# Altium PCB dc_p3_t11_PCB.PcbDoc (part 2 of 2)
Units mm, origin at the board's own origin, x right, y up, seen from the top; angles counter-clockwise.
Board outline 99.95 x 100 mm, 2 copper layers (Top Layer, Bottom Layer), stack 1.56 mm thick; 142 components, 91 nets, 397 pads, 74 vias.
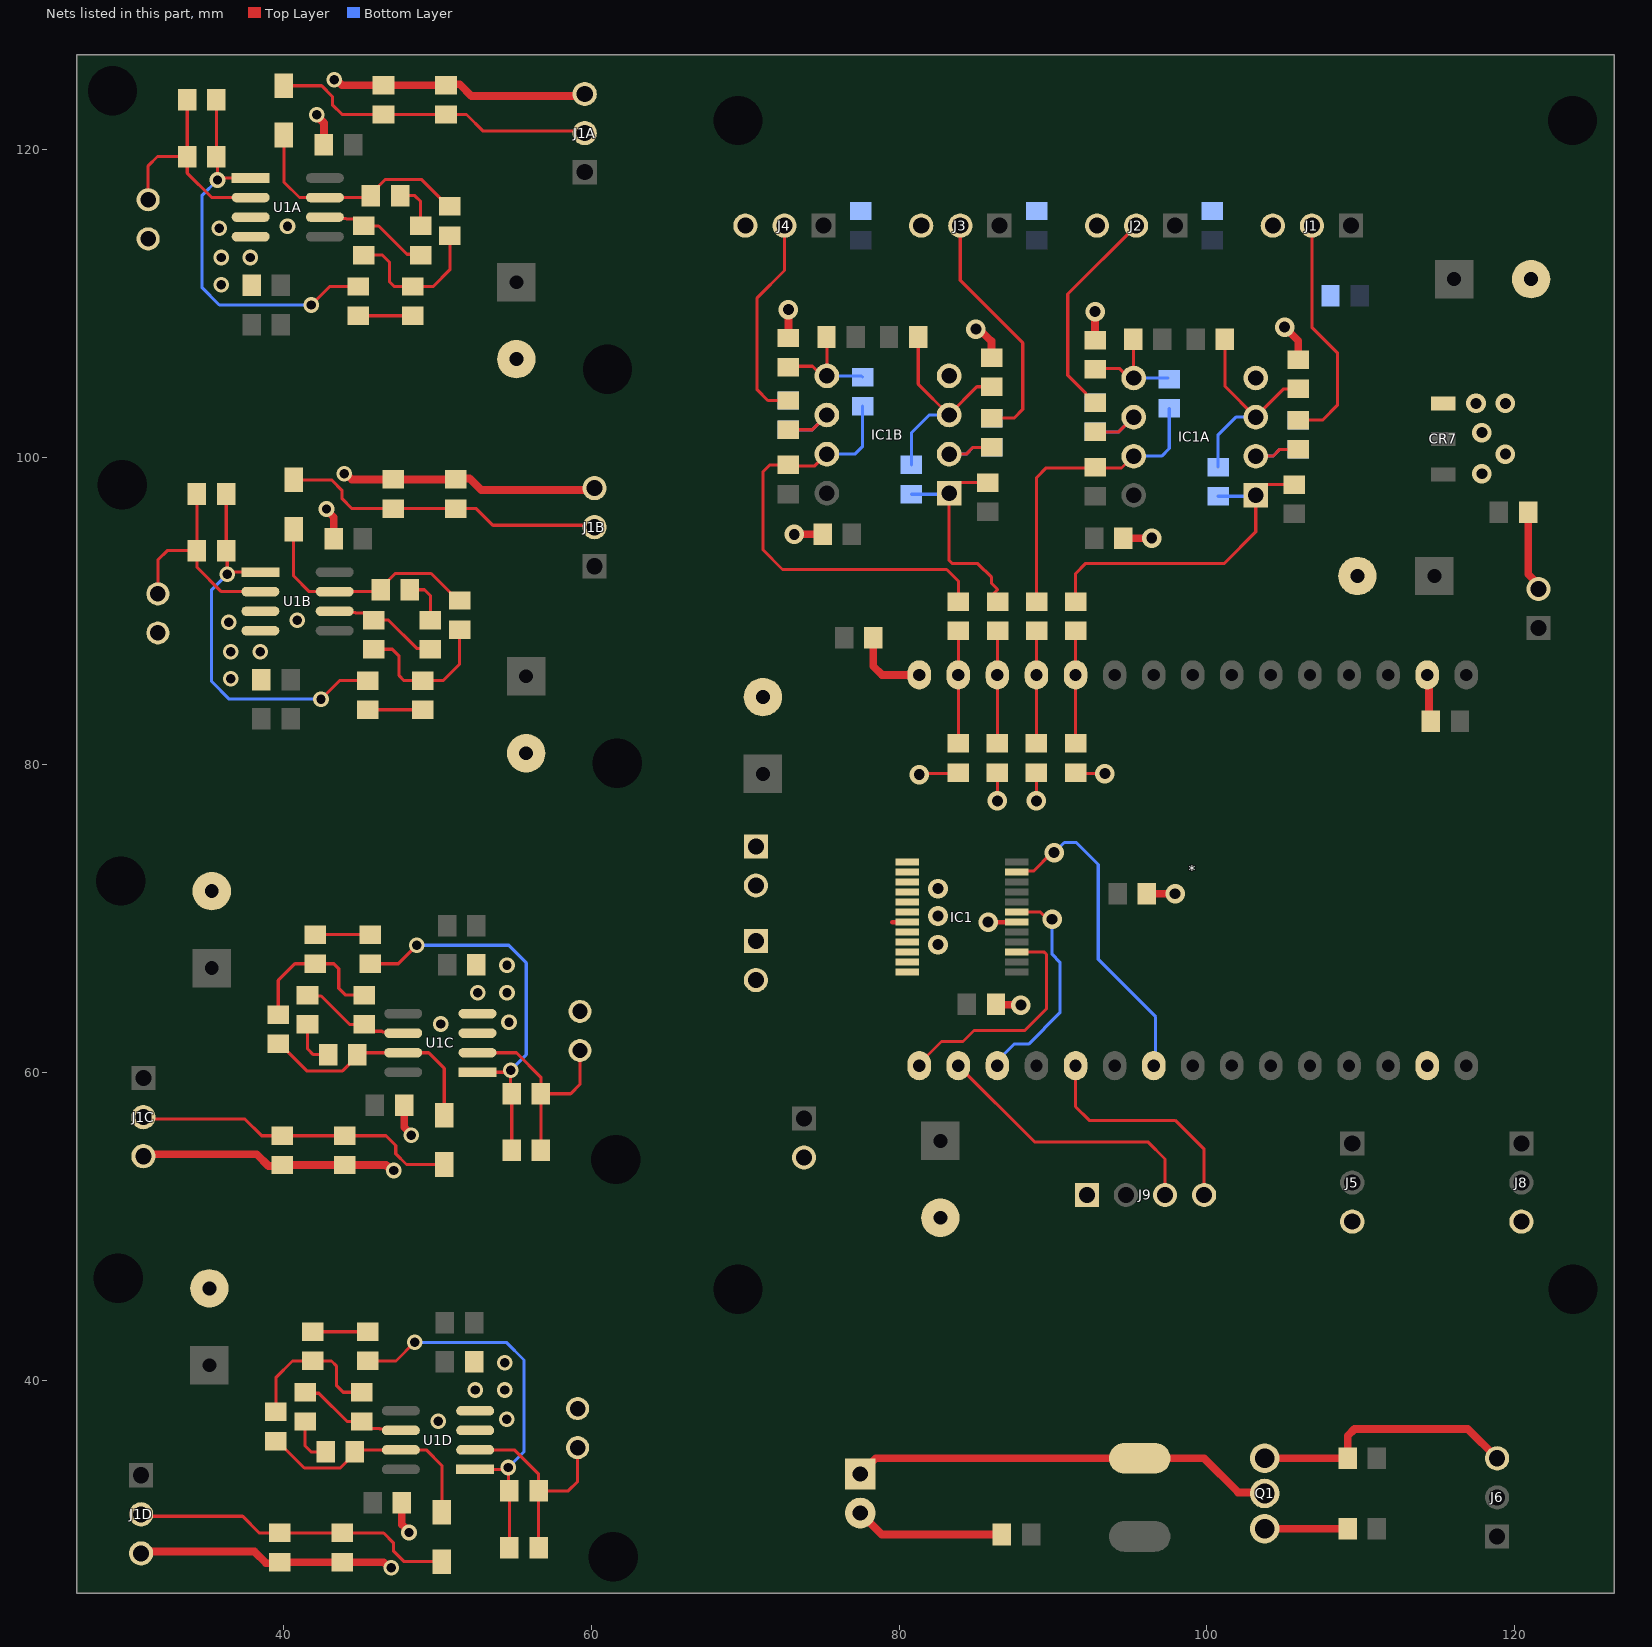
[diagram p2: the nets of this part, all layers, seen from the top]

## Via types
v1: diameter 1.27, hole 0.711, Top Layer to Bottom Layer, 38 vias
v2: diameter 1.016, hole 0.61, Top Layer to Bottom Layer, 36 vias

## Nets (pads, with @x,y where several pads share a name; then routed paths per layer and width w, separated by ;. In a path a pad name is that pad's centre, name@x,y a point inside that pad or via, vN(x,y) a via of type N, cw(c..) or ccw(c..) an arc to the next point about the centre after c; other vN are vias at no path point) (continued)
GND: *.2 *.17 C1.2 C1A.1@91.465,79.507 C1B.1@86.385,79.507 C2.2 C2A.1@88.925,79.507 C2B.1@83.845,79.507 C3.2 C3A.1@105.943,102.415 C3B.1@86.004,102.55 C4.2 C4A.1@92.735,103.558 C4B.1@72.796,103.693 C5A.1@94.574,94.742 C5B.1@75.021,94.996 CM1.2 CM2.2 CM3.2 CM4.1 CR7.1 Cs1.2 Cs2.2 Cs3.2 Cs4.2 IC1.3 IC1.4 IC1.9 IC1.10 IC1.18 IC1A.4 IC1B.4 J1.3 J2.3 J3.3 J4.3 J5.3 J8.3 J9.1 J_5V.2 J_6V.2 R2A.1@105.943,106.352 R2B.1@86.004,106.487 R5A.1@92.735,107.622 R5B.1@72.796,107.757 | length 34
  Top Layer w0.2: v1@85.901,77.494 v1@86.004,77.597
  Top Layer w0.203: v1@81.686,79.441 C2B.1@83.779,79.441 ; C2B.1@83.398,79.375 C2B.1@83.464,79.441 ; v1(86.385,77.663) C1B.1@86.385,79.507 ; v1(88.925,77.663) C2A.1@88.925,79.507 ; C1A.1@91.084,79.441 C1A.1@91.15,79.375 ; C1A.1@91.531,79.441 v1(93.37,79.441)
  Top Layer w0.3: v1(85.781,69.779) IC1.18@87.636,69.779
  Top Layer w0.5: CR7.1@115.367,103.494 CR7.1@115.372,103.499 ; v1@117.495,103.499 v1(117.5,103.505) ; C1.2@120.889,96.418 120.889,92.406 121.564,91.731 J_5V.2@121.564,91.44
  Top Layer w0.508: R5B.1@72.796,107.757 v1(72.796,109.601) ; v1(73.177,94.996) C5B.1@75.021,94.996 ; IC1B.4@83.243,105.291 IC1B.4@83.27,105.318 ; v1(84.988,108.331) 85.195,108.331 85.957,107.569 86.004,107.569 R2B.1@86.004,106.487 ; CM2.2@86.294,64.44 86.319,64.414 87.884,64.414 v1(87.909,64.389) ; R5A.1@92.735,107.622 v1(92.735,109.474) ; C5A.1@94.574,94.742 v1(96.418,94.742) ; CM4.1@96.098,71.628 v1(97.942,71.628) ; v1(105.054,108.458) 105.943,107.569 R2A.1@105.943,106.352 ; *.2@114.325,85.852 114.442,85.736 114.442,82.971 C3.2@114.558,82.854
  other v1: 82.525,68.326 82.525,70.18 82.525,71.958 81.305,79.375 117.881,98.933 119.405,100.203 117.881,101.6 119.405,103.505
GND_e: J6.3 Q1.3 Re1.1 | length 17.5
  Top Layer w0.508: Q1.3@103.759,34.929 103.761,34.927 109.157,34.927 Re1.1@109.159,34.925 109.159,36.388 109.601,36.83 116.967,36.83 J6.3@118.872,34.925
GNDA: C4A.2@50.539,124.187 C5A.1@42.604,120.316 C6A.2 D1A.2 J1A.3 R6A.1@46.475,124.187 R8A.1@37.905,111.172 U1A.3 U1A.4 | length 18.7
  Top Layer w0.508: v2(42.139,122.262) 42.139,122.195 42.604,121.73 C5A.1@42.604,120.316 ; v2(43.282,124.548) 43.419,124.548 43.781,124.187 R6A.1@46.475,124.187 C4A.2@50.539,124.187 ; C4A.2@50.605,124.253 51.428,124.253 52.19,123.491 J1A.3@59.429,123.491
  other v2: 35.916,111.213 35.916,112.991 37.821,112.991 35.789,114.896 40.234,115.023
GNDB: C4B.2@51.174,98.566 C5B.1@43.239,94.695 C6B.2 D1B.2 J1B.3 R6B.1@47.11,98.566 R8B.1@38.54,85.551 U1B.3 U1B.4 | length 18.7
  Top Layer w0.508: v2(42.774,96.642) 42.774,96.575 43.239,96.11 C5B.1@43.239,94.695 ; v2(43.917,98.928) 44.054,98.928 44.416,98.566 R6B.1@47.11,98.566 C4B.2@51.174,98.566 ; C4B.2@51.24,98.632 52.063,98.632 52.825,97.87 J1B.3@60.064,97.87
  other v2: 36.551,85.593 36.551,87.371 38.456,87.371 36.424,89.276 40.869,89.403
GNDC: C4C.2 C5C.1 C6C.2 D1C.2 J1C.3 R6C.1 R8C.1 U1C.3 U1C.4 | length 18.7
  Top Layer w0.508: J1C.3@30.995,54.69 38.234,54.69 38.996,53.928 C4C.2@39.819,53.928 ; C4C.2@39.885,53.994 R6C.1@43.949,53.994 46.643,53.994 47.005,53.633 v2(47.142,53.633) ; C5C.1@47.82,57.865 47.82,56.451 48.285,55.986 v2(48.285,55.919)
  other v2: 50.19,63.158 54.635,63.285 52.603,65.19 54.508,65.19 54.508,66.968
GNDD: C4D.2 C5D.1 C6D.2 D1D.2 J1D.3 R6D.1 R8D.1 U1D.3 U1D.4 | length 18.7
  Top Layer w0.508: J1D.3@30.842,28.87 38.081,28.87 38.843,28.108 C4D.2@39.666,28.108 ; C4D.2@39.732,28.174 R6D.1@43.796,28.174 46.491,28.174 46.853,27.813 v2(46.99,27.813) ; C5D.1@47.667,32.045 47.667,30.631 48.133,30.166 v2(48.133,30.099)
  other v2: 50.038,37.338 54.483,37.465 52.451,39.37 54.356,39.37 54.356,41.148
MA+: IC1.1 IC1.2 J12.1
MA-: IC1.5 IC1.6 J12.2
MB+: IC1.11 IC1.12 J13.2
MB-: IC1.7 IC1.8 J13.1 | length 1
  Top Layer w0.3: 79.561,69.779 IC1.7@80.512,69.779
Net*_15: *.15 R1.2 | length 5.1
  Top Layer w0.508: R1.2@78.318,88.265 78.318,86.426 78.892,85.852 *.15@81.305,85.852
NetC1A_2: C1A.2@33.714,123.237 D1A.1 R1A.1@33.714,119.554 U1A.2 | length 14.4
  Top Layer w0.203: D1A.1@31.176,116.743 31.176,118.945 31.785,119.554 R1A.1@33.714,119.554 C1A.2@33.714,123.237 ; R1A.1@33.714,119.454 33.714,118.472 35.299,116.887 U1A.2@37.839,116.887
NetC1B_2: C1B.2@34.349,97.616 D1B.1 R1B.1@34.349,93.933 U1B.2 | length 14.4
  Top Layer w0.203: D1B.1@31.811,91.123 31.811,93.324 32.42,93.933 R1B.1@34.349,93.933 C1B.2@34.349,97.616 ; R1B.1@34.349,93.833 34.349,92.851 35.934,91.266 U1B.2@38.474,91.266
NetC1C_2: C1C.2 D1C.1 R1C.1 U1C.2 | length 14.4
  Top Layer w0.203: U1C.2@52.585,61.294 55.125,61.294 56.71,59.709 R1C.1@56.71,58.727 ; C1C.2@56.71,54.944 R1C.1@56.71,58.627 58.639,58.627 59.248,59.236 D1C.1@59.248,61.438
NetC1D_2: C1D.2 D1D.1 R1D.1 U1D.2 | length 14.4
  Top Layer w0.203: U1D.2@52.433,35.474 54.972,35.474 56.557,33.889 R1D.1@56.557,32.907 ; C1D.2@56.557,29.124 R1D.1@56.557,32.807 58.487,32.807 59.096,33.416 D1D.1@59.096,35.618
NetC2A_1: C2A.1@45.205,115.043 R4A.1@48.888,113.143 U1A.6 | length 6.4
  Top Layer w0.203: U1A.6@42.746,115.536 44.016,115.536 44.062,115.49 C2A.1@44.758,115.49 ; C2A.1@45.205,115.043 46.16,115.043 47.999,113.204 R4A.1@48.827,113.204
NetC2A_2: C2A.2@45.205,113.143 C3A.2@50.793,114.413 R3A.2@48.38,111.106 | length 9.8
  Top Layer w0.203: C2A.2@45.205,113.143 46.409,113.143 46.856,112.696 46.856,111.426 47.176,111.106 R3A.2@48.38,111.106 49.711,111.106 50.793,112.188 C3A.2@50.793,114.413
NetC2B_1: C2B.1@45.84,89.422 R4B.1@49.523,87.522 U1B.6 | length 6.4
  Top Layer w0.203: U1B.6@43.381,89.916 44.651,89.916 44.697,89.869 C2B.1@45.393,89.869 ; C2B.1@45.84,89.422 46.795,89.422 48.634,87.583 R4B.1@49.462,87.583
NetC2B_2: C2B.2@45.84,87.522 C3B.2@51.428,88.792 R3B.2@49.015,85.485 | length 9.8
  Top Layer w0.203: C2B.2@45.84,87.522 47.044,87.522 47.491,87.075 47.491,85.805 47.811,85.485 R3B.2@49.015,85.485 50.346,85.485 51.428,86.567 C3B.2@51.428,88.792
NetC2C_1: C2C.1 R4C.1 U1C.6 | length 6.4
  Top Layer w0.203: R4C.1@41.597,64.977 42.425,64.977 44.264,63.138 C2C.1@45.219,63.138 ; C2C.1@45.666,62.691 46.362,62.691 46.408,62.645 U1C.6@47.678,62.645
NetC2C_2: C2C.2 C3C.2 R3C.2 | length 9.8
  Top Layer w0.203: C3C.2@39.631,63.768 39.631,65.993 40.713,67.075 R3C.2@42.044,67.075 43.248,67.075 43.568,66.755 43.568,65.485 44.015,65.038 C2C.2@45.219,65.038
NetC2D_1: C2D.1 R4D.1 U1D.6 | length 6.4
  Top Layer w0.203: R4D.1@41.444,39.157 42.272,39.157 44.111,37.318 C2D.1@45.066,37.318 ; C2D.1@45.513,36.871 46.209,36.871 46.256,36.825 U1D.6@47.526,36.825
NetC2D_2: C2D.2 C3D.2 R3D.2 | length 9.8
  Top Layer w0.203: C3D.2@39.478,37.948 39.478,40.173 40.56,41.255 R3D.2@41.891,41.255 43.095,41.255 43.415,40.935 43.415,39.665 43.862,39.218 C2D.2@45.066,39.218
NetJ7_2: J7.2 LED1.1 Q1.2 | length 27.7
  Top Layer w0.508: LED1.1@77.47,33.909 78.486,34.925 J7.2@95.631,34.925 99.822,34.925 102.037,32.71 103.688,32.71 Q1.2@103.759,32.639
NetLED1_2: LED1.2 Re3.1 | length 9.8
  Top Layer w0.508: LED1.2@77.47,31.369 78.867,29.972 Re3.1@86.68,29.972
NetQ1_1: Q1.1 Re2.2 | length 5.4
  Top Layer w0.508: Q1.1@103.759,30.349 103.761,30.351 109.157,30.351 Re2.2@109.159,30.353
NetR2A_2: R2A.2@44.824,109.206 R3A.1@48.38,109.206 | length 3.6
  Top Layer w0.203: R2A.2@44.824,109.206 R3A.1@48.38,109.206
NetR2B_2: R2B.2@45.459,83.585 R3B.1@49.015,83.585 | length 3.6
  Top Layer w0.203: R2B.2@45.459,83.585 R3B.1@49.015,83.585
NetR2C_2: R2C.2 R3C.1 | length 3.6
  Top Layer w0.203: R3C.1@42.044,68.975 R2C.2@45.6,68.975
NetR2D_2: R2D.2 R3D.1 | length 3.6
  Top Layer w0.203: R3D.1@41.891,43.155 R2D.2@45.447,43.155
NetR4A_2: R4A.2@48.888,115.043 R5A.1@47.552,117.014 | length 3.1
  Top Layer w0.203: R5A.1@47.552,117.014 48.507,117.014 48.888,116.633 R4A.2@48.888,115.043
NetR4B_2: R4B.2@49.523,89.422 R5B.1@48.187,91.393 | length 3.1
  Top Layer w0.203: R5B.1@48.187,91.393 49.142,91.393 49.523,91.012 R4B.2@49.523,89.422
NetR4C_2: R4C.2 R5C.1 | length 3.1
  Top Layer w0.203: R4C.2@41.536,63.138 41.536,61.548 41.917,61.167 R5C.1@42.872,61.167
NetR4D_2: R4D.2 R5D.1 | length 3.1
  Top Layer w0.203: R4D.2@41.383,37.318 41.383,35.728 41.764,35.347 R5D.1@42.719,35.347
PWMA: *.24 IC1.23 | length 21.3
  Top Layer w0.203: IC1.23@87.636,73.029 87.705,73.098 88.733,73.098 89.93,74.295 v1(90.068,74.295)
  Bottom Layer w0.203: v1(90.068,74.295) 90.077,74.295 90.737,74.955 91.516,74.955 92.939,73.533 92.939,67.361 96.672,63.627 *.24@96.672,60.452
PWMB: *.30 IC1.15 | length 15.8
  Top Layer w0.203: *.30@80.924,60.198 82.753,62.027 84.15,62.027 84.861,62.738 88.163,62.738 89.58,64.155 89.58,67.69 89.441,67.829 IC1.15@87.636,67.829
SCL: *.29 J9.3 | length 18.3
  Top Layer w0.203: *.29@83.845,60.452 88.798,55.499 96.164,55.499 97.282,54.381 J9.3@97.282,52.045
SDA: *.26 J9.4 | length 15.1
  Top Layer w0.203: *.26@91.465,60.452 91.465,57.785 92.354,56.896 97.942,56.896 99.822,55.016 J9.4@99.822,52.045
STBY: *.28 IC1.19 | length 14.9
  Top Layer w0.2: IC1.19@87.636,70.429 89.193,70.429 89.653,69.968 v1(89.943,69.968)
  Bottom Layer w0.203: *.28@86.004,60.198 86.004,60.386 87.467,61.849 88.417,61.849 90.449,63.881 90.449,67.183 89.943,67.69 v1(89.943,69.968)
V1+A: IC1A.3 R1A.1@101.178,107.688 R2A.2@105.943,104.452 R3A.1@100.736,99.367 | length 14.4
  Top Layer w0.203: R1A.1@101.178,107.688 101.178,104.62 IC1A.3@103.182,102.616 ; IC1A.3@103.182,102.641 104.993,104.452 R2A.2@105.943,104.452
  Bottom Layer w0.203: R3A.1@100.736,99.367 100.736,101.465 101.887,102.616 IC1A.3@103.182,102.616
V1+B: IC1B.3 R1B.1@81.239,107.823 R2B.2@86.004,104.587 R3B.1@80.797,99.502 | length 14.5
  Top Layer w0.203: R1B.1@81.239,107.823 81.239,104.755 IC1B.3@83.243,102.751 83.243,102.776 85.054,104.587 R2B.2@86.004,104.587
  Bottom Layer w0.203: R3B.1@80.797,99.502 80.797,101.6 81.948,102.751 IC1B.3@83.243,102.751
V1-A: C3A.2@105.943,100.515 IC1A.2 R11A.2 | length 5.9
  Top Layer w0.203: IC1A.2@103.182,100.076 104.3,100.076 104.739,100.515 R11A.2@105.943,100.515
  Bottom Layer w0.203: IC1A.2@103.182,100.076 104.3,100.076 104.739,100.515 C3A.2@105.943,100.515
V1-B: C3B.2@86.004,100.65 IC1B.2 R11B.2 | length 5.9
  Top Layer w0.203: IC1B.2@83.243,100.211 84.361,100.211 84.8,100.65 R11B.2@86.004,100.65
  Bottom Layer w0.203: IC1B.2@83.243,100.211 84.361,100.211 84.8,100.65 C3B.2@86.004,100.65
V2+A: IC1A.5 R4A.1@95.214,107.688 R5A.2@92.735,105.722 R6A.1@97.561,105.082 | length 7
  Top Layer w0.203: R5A.2@92.796,105.783 94.307,105.783 IC1A.5@94.934,105.156 ; IC1A.5@95.242,105.156 R4A.1@95.242,107.533
  Bottom Layer w0.203: IC1A.5@95.242,105.156 R6A.1@97.487,105.156
V2+B: IC1B.5 R4B.1@75.275,107.823 R5B.2@72.796,105.857 R6B.1@77.622,105.217 | length 7.6
  Top Layer w0.203: R5B.2@72.796,105.857 72.857,105.918 74.368,105.918 74.995,105.291 IC1B.5@75.303,105.291 75.303,107.668 R4B.1@75.275,107.696
  Bottom Layer w0.203: IC1B.5@75.303,105.291 77.548,105.291 R6B.1@77.622,105.217
V2-A: C4A.2@92.735,101.658 IC1A.6 R12A.2 | length 5.8
  Top Layer w0.203: R12A.2@92.735,101.658 94.284,101.658 IC1A.6@95.242,102.616
  Bottom Layer w0.203: C4A.2@92.735,101.658 94.284,101.658 IC1A.6@95.242,102.616
V2-B: C4B.2@72.796,101.793 IC1B.6 R12B.2 | length 5.8
  Top Layer w0.203: R12B.2@72.796,101.793 74.345,101.793 IC1B.6@75.303,102.751
  Bottom Layer w0.203: C4B.2@72.796,101.793 74.345,101.793 IC1B.6@75.303,102.751
Vcomp1: *.11 C1A.2@91.465,81.407 R9A.2 | length 7.4
  Top Layer w0.203: R9A.2@91.084,88.704 R9A.2@91.092,88.712 ; C1A.2@91.465,81.407 *.11@91.465,85.664 ; *.11@91.465,85.598 R9A.2@91.465,88.704
Vcomp2: *.12 C2A.2@88.925,81.407 R10A.2 | length 7.4
  Top Layer w0.203: R10A.2@88.544,88.704 R10A.2@88.552,88.712 ; C2A.2@88.925,81.407 *.12@88.925,85.664 ; *.12@88.925,85.598 R10A.2@88.925,88.704
Vcomp3: *.13 C1B.2@86.385,81.407 R9B.2 | length 7.4
  Top Layer w0.203: R9B.2@86.004,88.704 R9B.2@86.012,88.712 ; C1B.2@86.385,81.407 *.13@86.385,85.664 ; *.13@86.385,85.598 R9B.2@86.385,88.704
Vcomp4: *.14 C2B.2@83.845,81.407 R10B.2 | length 7.4
  Top Layer w0.203: R10B.2@83.464,88.704 R10B.2@83.472,88.712 ; C2B.2@83.845,81.407 *.14@83.845,85.664 ; *.14@83.845,85.598 R10B.2@83.845,88.704
Venv1: J1.2 R11A.1 | length 15.3
  Top Layer w0.203: R11A.1@105.943,102.415 107.52,102.415 108.483,103.378 108.483,106.807 106.832,108.458 J1.2@106.832,115.062
Venv2: J2.2 R12A.1 | length 14.1
  Top Layer w0.203: R12A.1@92.735,103.558 92.635,103.558 92.137,104.056 92.137,104.156 90.957,105.336 90.957,110.617 J2.2@95.402,115.062
Venv3: J3.2 R11B.1 | length 15.9
  Top Layer w0.203: J3.2@83.972,115.062 83.972,111.506 88.036,107.442 88.036,103.124 87.462,102.55 R11B.1@86.004,102.55
Venv4: J4.2 R12B.1 | length 13.7
  Top Layer w0.203: J4.2@72.542,115.062 72.542,112.141 70.764,110.363 70.764,104.394 71.465,103.693 R12B.1@72.796,103.693
VenvA: C4A.1@50.539,122.287 D2A.1 J1A.2 R6A.2@46.475,122.287 | length 21
  Top Layer w0.203: D2A.1@39.998,124.152 42.457,124.152 43.155,123.454 43.155,122.922 43.79,122.287 R6A.2@46.475,122.287 C4A.1@50.539,122.287 51.87,122.287 52.952,121.205 J1A.2@59.429,121.205
VenvB: C4B.1@51.174,96.666 D2B.1 J1B.2 R6B.2@47.11,96.666 | length 21
  Top Layer w0.203: D2B.1@40.633,98.531 43.092,98.531 43.79,97.834 43.79,97.301 44.425,96.666 R6B.2@47.11,96.666 C4B.1@51.174,96.666 52.505,96.666 53.587,95.584 J1B.2@60.064,95.584
VenvC: C4C.1 D2C.1 J1C.2 R6C.2 | length 21
  Top Layer w0.203: J1C.2@30.995,56.976 37.472,56.976 38.554,55.894 C4C.1@39.885,55.894 R6C.2@43.949,55.894 46.634,55.894 47.269,55.259 47.269,54.727 47.967,54.029 D2C.1@50.426,54.029
VenvD: C4D.1 D2D.1 J1D.2 R6D.2 | length 21
  Top Layer w0.203: J1D.2@30.842,31.156 37.319,31.156 38.401,30.074 C4D.1@39.732,30.074 R6D.2@43.796,30.074 46.482,30.074 47.117,29.439 47.117,28.907 47.815,28.209 D2D.1@50.273,28.209
VmfbA: C3A.1@50.793,116.313 D2A.2 R5A.2@45.652,117.014 U1A.7 | length 15.2
  Top Layer w0.203: D2A.2@39.998,120.952 39.998,117.903 41.014,116.887 U1A.7@42.666,116.887 R5A.2@45.525,116.887 ; R5A.2@45.652,117.114 46.608,118.069 48.937,118.069 C3A.1@50.693,116.313
VmfbB: C3B.1@51.428,90.692 D2B.2 R5B.2@46.287,91.393 U1B.7 | length 15.2
  Top Layer w0.203: D2B.2@40.633,95.331 40.633,92.282 41.649,91.266 U1B.7@43.301,91.266 R5B.2@46.16,91.266 ; R5B.2@46.287,91.493 47.243,92.449 49.572,92.449 C3B.1@51.328,90.692
VmfbC: C3C.1 D2C.2 R5C.2 U1C.7 | length 15.2
  Top Layer w0.203: C3C.1@39.731,61.868 41.487,60.112 43.816,60.112 R5C.2@44.772,61.067 ; R5C.2@44.899,61.294 U1C.7@47.758,61.294 49.41,61.294 50.426,60.278 D2C.2@50.426,57.229
VmfbD: C3D.1 D2D.2 R5D.2 U1D.7 | length 15.2
  Top Layer w0.203: C3D.1@39.578,36.048 41.335,34.292 43.664,34.292 R5D.2@44.619,35.247 ; R5D.2@44.746,35.474 U1D.7@47.606,35.474 49.257,35.474 50.273,34.458 D2D.2@50.273,31.409
Vout1A: IC1A.1 R3A.2@100.736,97.467 R7A.1@105.689,98.224 R9A.1 | length 22.2
  Top Layer w0.203: R9A.1@91.473,90.612 91.473,92.448 92.1,93.075 92.1,93.091 101.117,93.091 103.182,95.156 IC1A.1@103.182,97.536 103.87,98.224 R7A.1@105.689,98.224
  Bottom Layer w0.203: R3A.2@100.736,97.467 IC1A.1@103.113,97.467
Vout1B: IC1B.1 R3B.2@80.797,97.602 R7B.1@85.75,98.359 R9B.1 | length 14.8
  Top Layer w0.203: R7B.1@85.75,98.359 83.931,98.359 IC1B.1@83.243,97.671 83.243,93.312 83.464,93.091 85.115,93.091 86.012,92.194 86.012,91.799 86.393,91.418 86.393,91.389 86.012,91.008 R9B.1@86.012,90.612
  Bottom Layer w0.203: R3B.2@80.797,97.602 83.174,97.602 IC1B.1@83.243,97.671
Vout2A: IC1A.7 R6A.2@97.561,103.182 R8A.1@92.735,99.367 R10A.1 | length 20
  Top Layer w0.203: R10A.1@88.933,90.612 88.933,98.687 89.56,99.314 92.682,99.314 R8A.1@92.735,99.367 ; R8A.1@92.796,99.306 94.45,99.306 IC1A.7@95.22,100.076
  Bottom Layer w0.203: IC1A.7@95.242,100.076 97.061,100.076 97.561,100.576 R6A.2@97.561,103.182
Vout2B: IC1B.7 R6B.2@77.622,103.317 R8B.1@72.796,99.502 R10B.1 | length 29.8
  Top Layer w0.203: IC1B.7@75.303,100.211 75.281,100.211 74.511,99.441 72.857,99.441 R8B.1@72.796,99.502 71.587,99.502 71.145,99.06 71.145,93.98 72.415,92.71 83.083,92.71 83.853,91.94 R10B.1@83.853,90.612
  Bottom Layer w0.203: IC1B.7@75.303,100.211 77.122,100.211 77.622,100.711 R6B.2@77.622,103.317
VtiaA: C1A.1@35.614,123.237 R1A.2@35.614,119.554 R2A.1@44.824,111.106 U1A.1 | length 25.4
  Top Layer w0.203: R1A.2@35.614,119.554 C1A.1@35.614,123.237 ; R1A.2@35.68,119.488 35.68,118.403 v2@35.8,118.284 ; v2@35.934,118.157 U1A.1@37.839,118.157 ; v2(41.776,109.902) 42.98,111.106 R2A.1@44.824,111.106
  Bottom Layer w0.203: v2(35.68,118.03) 34.664,117.014 34.664,111.045 35.807,109.902 v2(41.776,109.902)
VtiaB: C1B.1@36.249,97.616 R1B.2@36.249,93.933 R2B.1@45.459,85.485 U1B.1 | length 25.4
  Top Layer w0.203: R1B.2@36.249,93.933 C1B.1@36.249,97.616 ; R1B.2@36.315,93.867 36.315,92.782 v2@36.435,92.663 ; v2@36.569,92.536 U1B.1@38.474,92.536 ; v2(42.411,84.281) 43.615,85.485 R2B.1@45.459,85.485
  Bottom Layer w0.203: v2(36.315,92.409) 35.299,91.393 35.299,85.424 36.442,84.281 v2(42.411,84.281)
VtiaC: C1C.1 R1C.2 R2C.1 U1C.1 | length 25.4
  Top Layer w0.203: R2C.1@45.6,67.075 47.444,67.075 v2(48.648,68.279) ; U1C.1@52.585,60.024 v2@54.49,60.024 ; v2@54.624,59.897 54.744,59.778 R1C.2@54.744,58.693 ; C1C.1@54.81,54.944 R1C.2@54.81,58.627
  Bottom Layer w0.203: v2(48.648,68.279) 54.617,68.279 55.76,67.136 55.76,61.167 v2(54.744,60.151)
VtiaD: C1D.1 R1D.2 R2D.1 U1D.1 | length 25.4
  Top Layer w0.203: R2D.1@45.447,41.255 47.291,41.255 v2(48.495,42.459) ; U1D.1@52.433,34.204 v2@54.337,34.204 ; v2@54.472,34.077 54.591,33.958 R1D.2@54.591,32.873 ; C1D.1@54.657,29.124 R1D.2@54.657,32.807
  Bottom Layer w0.203: v2(48.495,42.459) 54.464,42.459 55.607,41.316 55.607,35.347 v2(54.591,34.331)
pads on no net: *.3 *.4 *.5 *.16 *.18 *.19 *.20 *.21 *.22 *.23

## Polygon pours and split planes (outlines as drawn)
GNDD on Top Layer "GNDD_L01_P116" (solid, pour order 116): 51.416,40.3 50.146,39.03 49.384,39.03 49.257,38.903 49.257,35.982 55.109,35.982 56.032,36.906 56.032,41.504 54.823,42.713 52.178,42.713 51.416,41.951
3V3D on Top Layer "3V3D_L01_P107" (solid, pour order 107): 28.28,32.553 27.667,33.147 27.667,40.681 30.166,43.18 36.853,43.18 38.335,41.698 38.335,35.347 39.732,33.95 45.066,33.95 45.955,34.839 48.749,34.839 49.13,34.458 49.13,33.696 48.495,33.061 47.479,33.061 46.844,33.061 46.717,32.934 46.717,31.41 46.463,31.156 38.081,31.156 36.684,32.553
GNDB on Top Layer "GNDB_L01_P115" (solid, pour order 115): 39.49,86.44 40.76,87.71 41.522,87.71 41.649,87.837 41.649,90.758 35.798,90.758 34.875,89.835 34.875,85.237 36.084,84.027 38.728,84.027 39.49,84.789
3V3B on Top Layer "3V3B_L01_P106" (solid, pour order 106): 62.627,94.187 63.239,93.594 63.239,86.059 60.741,83.561 54.054,83.561 52.571,85.043 52.571,91.393 51.174,92.79 45.84,92.79 44.951,91.901 42.157,91.901 41.776,92.282 41.776,93.044 42.411,93.679 43.427,93.679 44.062,93.679 44.189,93.806 44.189,95.33 44.443,95.584 52.825,95.584 54.222,94.187
GNDA on Top Layer "GNDA_L01_P114" (solid, pour order 114): 38.855,112.061 40.125,113.331 40.887,113.331 41.014,113.458 41.014,116.379 35.163,116.379 34.24,115.455 34.24,110.857 35.449,109.648 38.093,109.648 38.855,110.41
3V3A on Top Layer "3V3A_L01_P105" (solid, pour order 105): 61.992,119.808 62.604,119.214 62.604,111.68 60.106,109.181 53.419,109.181 51.936,110.663 51.936,117.014 50.539,118.411 45.205,118.411 44.316,117.522 41.522,117.522 41.141,117.903 41.141,118.665 41.776,119.3 42.792,119.3 43.427,119.3 43.554,119.427 43.554,120.951 43.808,121.205 52.19,121.205 53.587,119.808
MA- on Top Layer "MA-_L01_P118" (solid, pour order 118): 79.096,70.104 78.892,70.307 69.342,70.307 69.342,73.177 75.413,73.177 75.463,73.228 76.276,72.415 77.978,72.415 78.969,71.425 81.28,71.425 81.274,71.419 81.274,70.104
6V on Top Layer "6V_L01_P121" (solid, pour order 121): 71.577,63.881 72.187,64.491 73.914,64.491 76.251,64.491 77.19,64.491 78.054,65.355 78.054,65.405 79.654,65.405 80.203,65.954 80.227,65.954 80.227,66.613 80.518,66.904 82.804,66.904 83.718,67.818 83.718,74.403 86.82,74.376 88.082,74.376 88.417,74.041 88.417,73.406 87.02,73.406 86.843,73.228 86.843,67.691 88.798,67.691 89.052,67.437 89.052,65.913 88.579,65.44 85.658,65.44 85.383,65.165 85.344,65.165 85.344,63.44 85.023,63.119 83.82,63.119 81.458,63.119 80.366,62.027 78.918,62.027 78.232,61.341 78.232,58.928 79.578,57.582 84.404,57.582 84.938,57.048 84.938,53.569 84.201,52.832 77.368,52.832 75.641,54.559 75.641,54.941 74.885,55.698 72.547,55.698 71.577,56.667
GNDC on Top Layer "GNDC_L01_P113" (solid, pour order 113): 51.569,66.12 50.299,64.85 49.537,64.85 49.41,64.723 49.41,61.802 55.261,61.802 56.184,62.726 56.184,67.324 54.975,68.533 52.331,68.533 51.569,67.771
3V3C on Top Layer "3V3C_L01_P104" (solid, pour order 104): 28.432,58.373 27.82,58.967 27.82,66.501 30.318,69 37.005,69 38.488,67.518 38.488,61.167 39.885,59.77 45.219,59.77 46.108,60.659 48.902,60.659 49.283,60.278 49.283,59.516 48.648,58.881 47.632,58.881 46.997,58.881 46.87,58.754 46.87,57.23 46.616,56.976 38.234,56.976 36.837,58.373
3V3 on Top Layer "3V3_L01_P128" (solid, pour order 128): 81.178,94.361 80.162,93.345 76.352,93.345 75.717,93.98 75.717,95.996 72.177,95.996 71.526,96.647 71.526,98.552 71.78,98.806 74.447,98.806 74.701,99.06 77.876,99.06 79.781,97.155 79.781,96.52 80.416,96.52 81.178,95.758
5V on Top Layer "5V_L01_P122" (solid, pour order 122): 118.516,78.359 118.516,58.674 117.627,57.785 108.61,57.785 107.975,57.15 107.975,54.229 108.229,53.975 124.231,53.975 125.501,55.245 125.494,55.252 125.494,64.262 125.552,64.262 125.578,64.287 125.512,90.17 120.548,90.17 119.786,90.932 119.786,94.183 120.167,94.564 120.167,97.282 119.659,97.79 119.583,97.714 116.586,97.714 116.586,99.847 116.484,99.949 113.309,99.949 112.42,99.06 112.42,89.408 113.817,88.011 114.833,88.011 115.214,87.63 115.214,84.068 115.468,83.814 115.468,81.407
3V3 on Top Layer "3V3_L01_P129" (solid, pour order 129): 80.416,78.232 83.083,78.232 84.607,76.708 94.386,76.708 95.275,75.819 95.275,69.469 95.021,69.215 93.624,69.215 93.398,69.441 93.398,73.547 91.761,75.184 79.273,75.184 78.257,76.2 69.748,76.2 68.351,77.597 68.351,81.661 68.986,82.296 71.653,82.296 72.796,83.439 72.796,91.313 73.685,92.202 81.305,92.202 81.559,91.948 81.559,90.297 81.178,89.916 77.749,89.916 77.241,89.408 77.241,81.407
3V3 on Top Layer "3V3_L01_P126" (solid, pour order 126): 97.561,95.25 97.561,93.98 97.942,93.599 100.736,93.599 101.879,94.742 101.879,96.012 101.371,96.52 99.339,96.52 98.704,97.155 98.704,98.044 97.942,98.806 94.005,98.806 93.878,98.679 90.449,98.679 90.195,98.425 90.195,94.234 90.957,93.472 93.624,93.472 93.878,93.726 93.878,95.631 94.132,95.885 96.926,95.885
3V3 on Top Layer "3V3_L01_P125" (solid, pour order 125): 109.372,100.457 108.61,99.695 107.467,99.695 106.832,99.06 106.832,97.917 106.189,97.274 104.792,97.274 104.546,97.028 104.546,94.996 102.26,92.71 102.26,91.313 103.276,90.297 106.324,90.297 106.324,90.424 107.975,92.075 107.975,96.139 108.61,96.774 111.658,96.774 111.658,99.314 112.547,100.203 116.357,100.203 116.611,100.457 116.611,101.854 116.484,101.854 116.103,102.235 113.563,102.235 113.436,102.108 113.182,102.362 113.182,104.648 113.817,105.283 117.627,105.283 118.516,106.172 118.516,119.126 117.627,120.015 74.574,120.015 74.447,120.142 73.812,119.507 73.812,113.157 74.32,112.649 75.844,112.649 76.352,113.157 76.352,116.637 76.809,117.094 84.607,117.094 85.242,116.459 85.242,113.665 85.877,113.03 87.02,113.03 87.707,113.717 87.707,116.892 87.909,117.094 96.291,117.094 96.672,116.713 96.672,113.411 96.926,113.157 98.831,113.157 99.355,113.681 99.355,116.856 99.72,117.221 107.467,117.221 107.975,116.713 107.975,113.792 109.372,112.395
GND on Top Layer "GND_L01_P124" (solid, pour order 124): 114.071,104.267 114.071,102.743 114.452,102.362 116.738,102.362 116.992,102.108 116.992,98.044 120.167,98.044 120.294,98.171 120.294,104.267 119.913,104.648 114.452,104.648
MA+ on Top Layer "MA+_L01_P117" (solid, pour order 117): 81.356,72.593 76.708,72.593 75.895,73.406 69.342,73.406 69.342,75.768 77.775,75.768 79.502,74.041 81.356,74.041
MB- on Top Layer "MB-_L01_P119" (solid, pour order 119): 81.585,68.859 81.585,70.231 79.282,70.231 78.948,69.897 69.342,69.897 69.342,67.412 78.105,67.412 79.553,68.859
MB+ on Top Layer "MB+_L01_P120" (solid, pour order 120): 79.198,67.514 81.432,67.514 81.432,66.192 78.435,66.192 77.064,64.821 69.393,64.821 69.393,67.346 79.03,67.346
GND on Top Layer "GND_L01_P123" (solid, pour order 123): 79.495,68.802 79.495,67.514 83.031,67.514 83.033,67.513 83.363,67.843 83.363,72.441 83.083,72.72 79.68,72.72 79.68,71.526 79.781,71.425 81.356,71.425 81.585,71.196 81.585,68.859 79.553,68.859
GND on Bottom Layer "GND_L02_P127" (solid, pour order 127): 125.705,45.187 124.536,44.018 69.331,44.018 67.589,46.095 67.589,122.403 69.012,123.825 124.701,123.825 125.705,122.822
GNDA on Bottom Layer "GNDA_L02_P112" (solid, pour order 112): 62.985,103.806 62.985,125.523 27.255,125.523 27.255,103.806
GNDB on Bottom Layer "GNDB_L02_P111" (solid, pour order 111): 63.62,78.185 63.62,99.902 27.89,99.902 27.89,78.185
GNDD on Bottom Layer "GNDD_L02_P110" (solid, pour order 110): 27.286,48.555 27.286,26.838 63.017,26.838 63.017,48.555
GNDC on Bottom Layer "GNDC_L02_P109" (solid, pour order 109): 27.439,74.375 27.439,52.658 63.169,52.658 63.169,74.375
3V3 on Bottom Layer "3V3_L02_P108" (solid, pour order 108): 82.448,93.726 82.067,93.726 81.559,93.218 81.559,90.297 81.178,89.916 78.638,89.916 78.257,90.297 78.257,93.726 77.721,94.262 77.721,95.984 78.257,96.52 84.099,96.52 84.48,96.901 84.48,97.089 84.8,97.409 86.45,97.409 86.45,97.728 87.02,98.298 93.566,98.298 94.005,98.737 94.005,98.806 97.942,98.806 98.577,98.171 98.577,97.282 99.339,96.52 101.879,96.52 102.387,96.012 102.387,95.631 103.149,94.869 105.308,94.869 106.324,93.853 106.324,93.345 104.038,91.059 102.895,91.059 101.625,92.329 101.625,92.964 100.99,93.599 97.942,93.599 97.561,93.98 97.561,95.25 96.926,95.885 93.717,95.885 93.528,95.696 93.528,93.726

## Keep-outs
Keep-Out Layer:
  the board outline again, w0.254

## Silkscreen, mask and mechanical layers (free items; w line width, h text height)
Top Overlay:
  lines w0.254: 27.051,76.2 65.278,76.2 ; 27.178,50.292 65.151,50.292 ; 27.432,102.108 65.659,102.108 ; 65.786,27.178 65.786,125.73 ; 66.929,41.402 125.857,41.402
  text "GND" at 68.351,110.236 h1
  text "GND" at 102.596,109.951 h1
  text "GND" at 119.741,93.06 h1
  text "5V" at 108.864,57.15 h1
  text "5V" at 121.31,57.15 h1
  text "GND" at 70.764,50.8 h1
  text "GND" at 113.563,49.53 h1
  text "GND" at 88.163,49.149 h1
  text "-" at 95.123,36.33 h1
  text "+" at 95.123,26.884 h1
Mechanical 1:
  lines w0.254: 26.6,26.2 126.492,26.2 126.492,126.2 26.6,126.2 26.6,26.2

## Text inside footprints (layer, text, board x,y; h text height)
*: Bottom Overlay "GPIO18" at 96.798,63.51 h1 r90; Bottom Overlay "EN" at 81.558,84.592 h1 r90; Bottom Overlay "GPIO32" at 94.258,84.592 h1 r90; Bottom Overlay "GPIO14" at 106.958,84.592 h1 r90; Bottom Overlay "GPIO13" at 112.038,84.592 h1 r90; Bottom Overlay "GPIO4" at 106.958,63.51 h1 r90; Bottom Overlay "USB" at 124.63,74.424 h1 r90; Bottom Overlay "GPIO35" at 91.718,84.592 h1 r90; Bottom Overlay "GPIO25" at 99.338,84.592 h1 r90; Bottom Overlay "GPIO22" at 84.098,63.51 h1 r90; Bottom Overlay "GPIO21" at 91.464,63.51 h1 r90; Bottom Overlay "GPIO34" at 89.178,84.592 h1 r90; Bottom Overlay "GPIO5" at 99.338,63.51 h1 r90; Bottom Overlay "GND" at 114.578,63.51 h1 r90; Bottom Overlay "GPIO33" at 96.798,84.592 h1 r90; Bottom Overlay "VIN" at 117.118,84.592 h1 r90; Bottom Overlay "GPIO19" at 94.258,63.51 h1 r90; Bottom Overlay "GPIO3" at 89.178,63.51 h1 r90; Bottom Overlay "GPIO12" at 109.498,84.592 h1 r90; Bottom Overlay "GPIO1" at 86.638,63.51 h1 r90; Bottom Overlay "GPIO16" at 104.418,63.51 h1 r90; Bottom Overlay "GPIO39" at 86.638,84.592 h1 r90; Bottom Overlay "GPIO2" at 109.498,63.51 h1 r90; Bottom Overlay "GPIO36" at 84.098,84.592 h1 r90; Bottom Overlay "GPIO26" at 101.878,84.592 h1 r90; Bottom Overlay "GPIO27" at 104.418,84.592 h1 r90; Bottom Overlay "GPIO17" at 101.878,63.51 h1 r90; Bottom Overlay "GND" at 114.578,84.592 h1 r90; Bottom Overlay "3.3v" at 117.118,63.51 h1 r90; Bottom Overlay "GPIO15" at 112.038,63.51 h1 r90; Bottom Overlay "GPIO23" at 81.558,63.51 h1 r90
C2: Top Overlay "+" at 115.53,113.106 h1
C4: Top Overlay "+" at 115.341,90.759 h1 r180
C6A: Top Overlay "+" at 56.636,111.933 h1 r270
C6B: Top Overlay "+" at 57.271,86.313 h1 r270
C6C: Top Overlay "+" at 33.788,66.248 h1 r90
C6D: Top Overlay "+" at 33.636,40.427 h1 r90
CM1: Top Overlay "+" at 84.201,56.109 h1 r270
CM3: Top Overlay "+" at 69.621,78.867 h1 r90